# Altium PCB PCB.PcbDoc
Units mm, origin at the board's own origin, x right, y up, seen from the top; angles counter-clockwise.
Board outline 31.8 x 34 mm, 2 copper layers (Top Layer, Bottom Layer); 15 components, 13 nets, 61 pads, 7 vias.
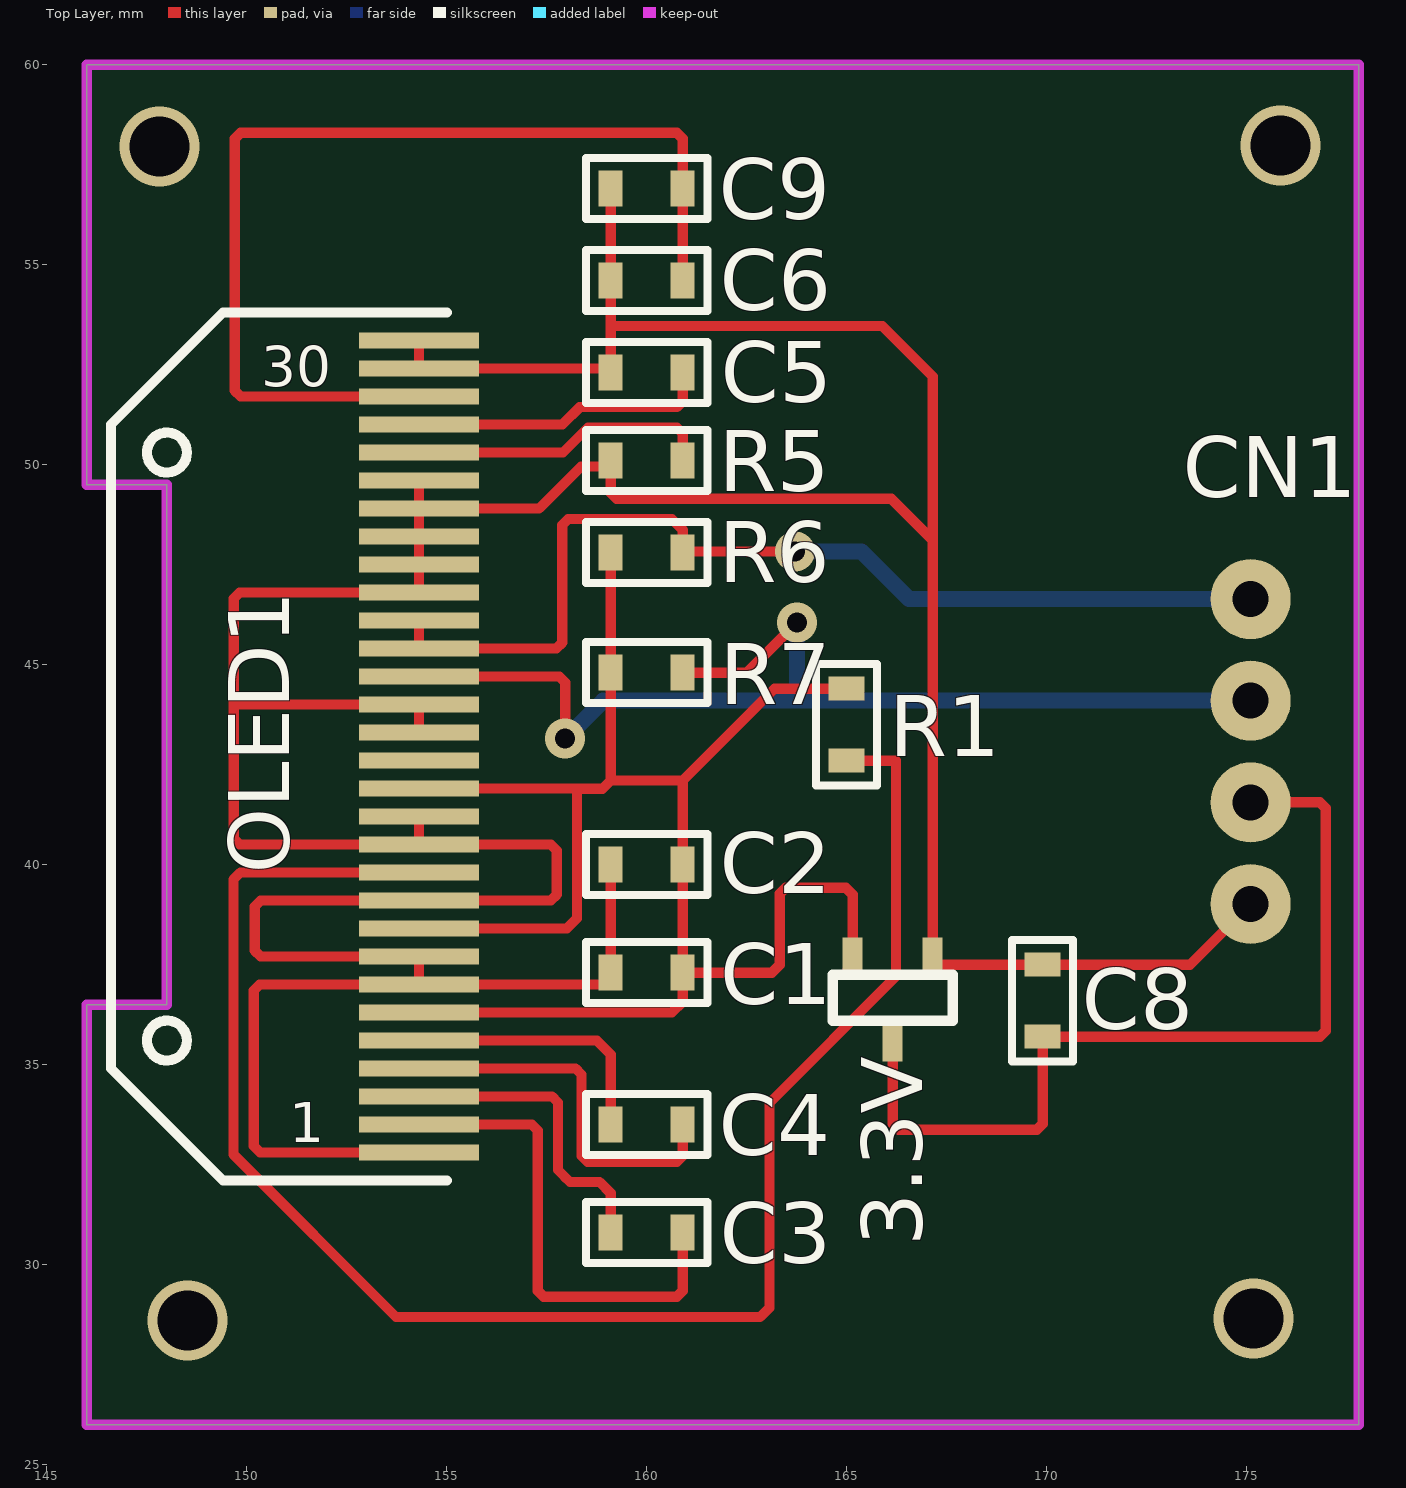
[diagram p0: Top Layer view]
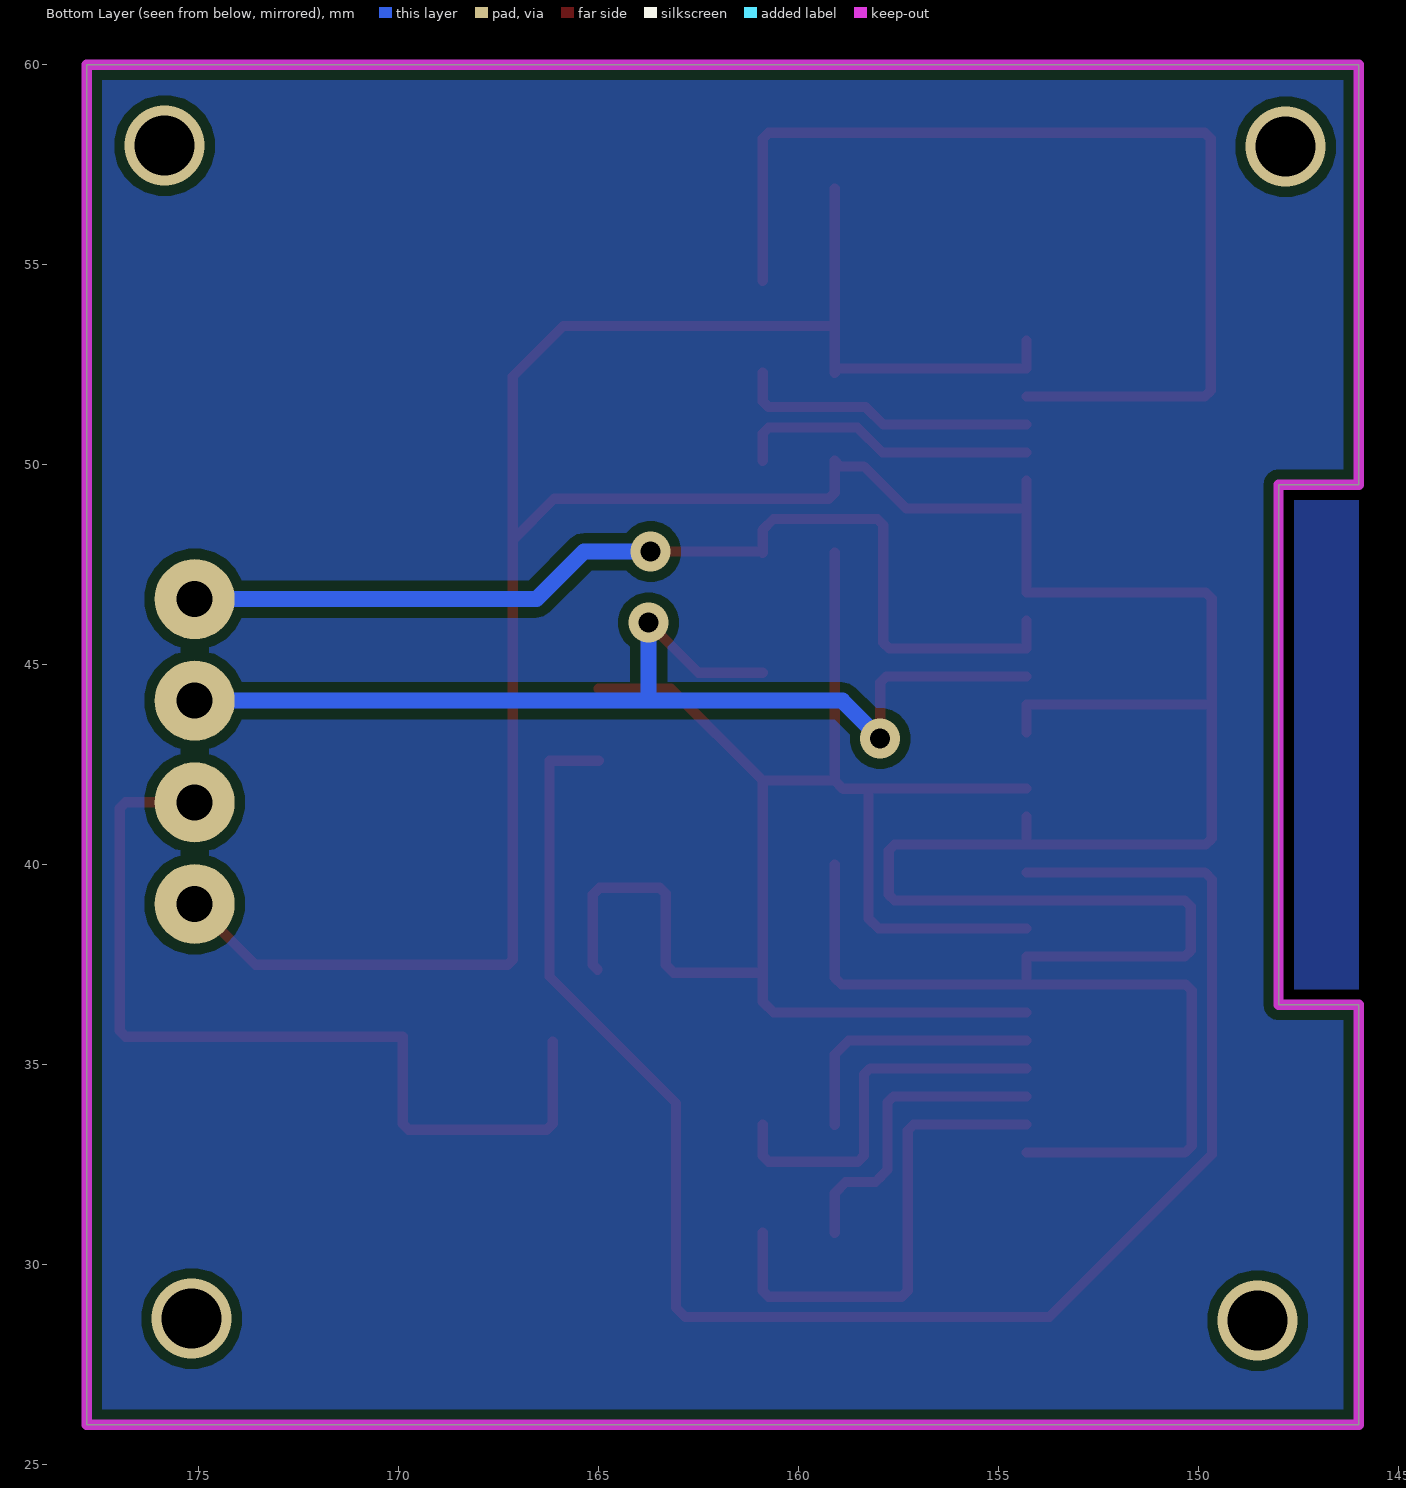
[diagram p1: Bottom Layer view, seen from below]
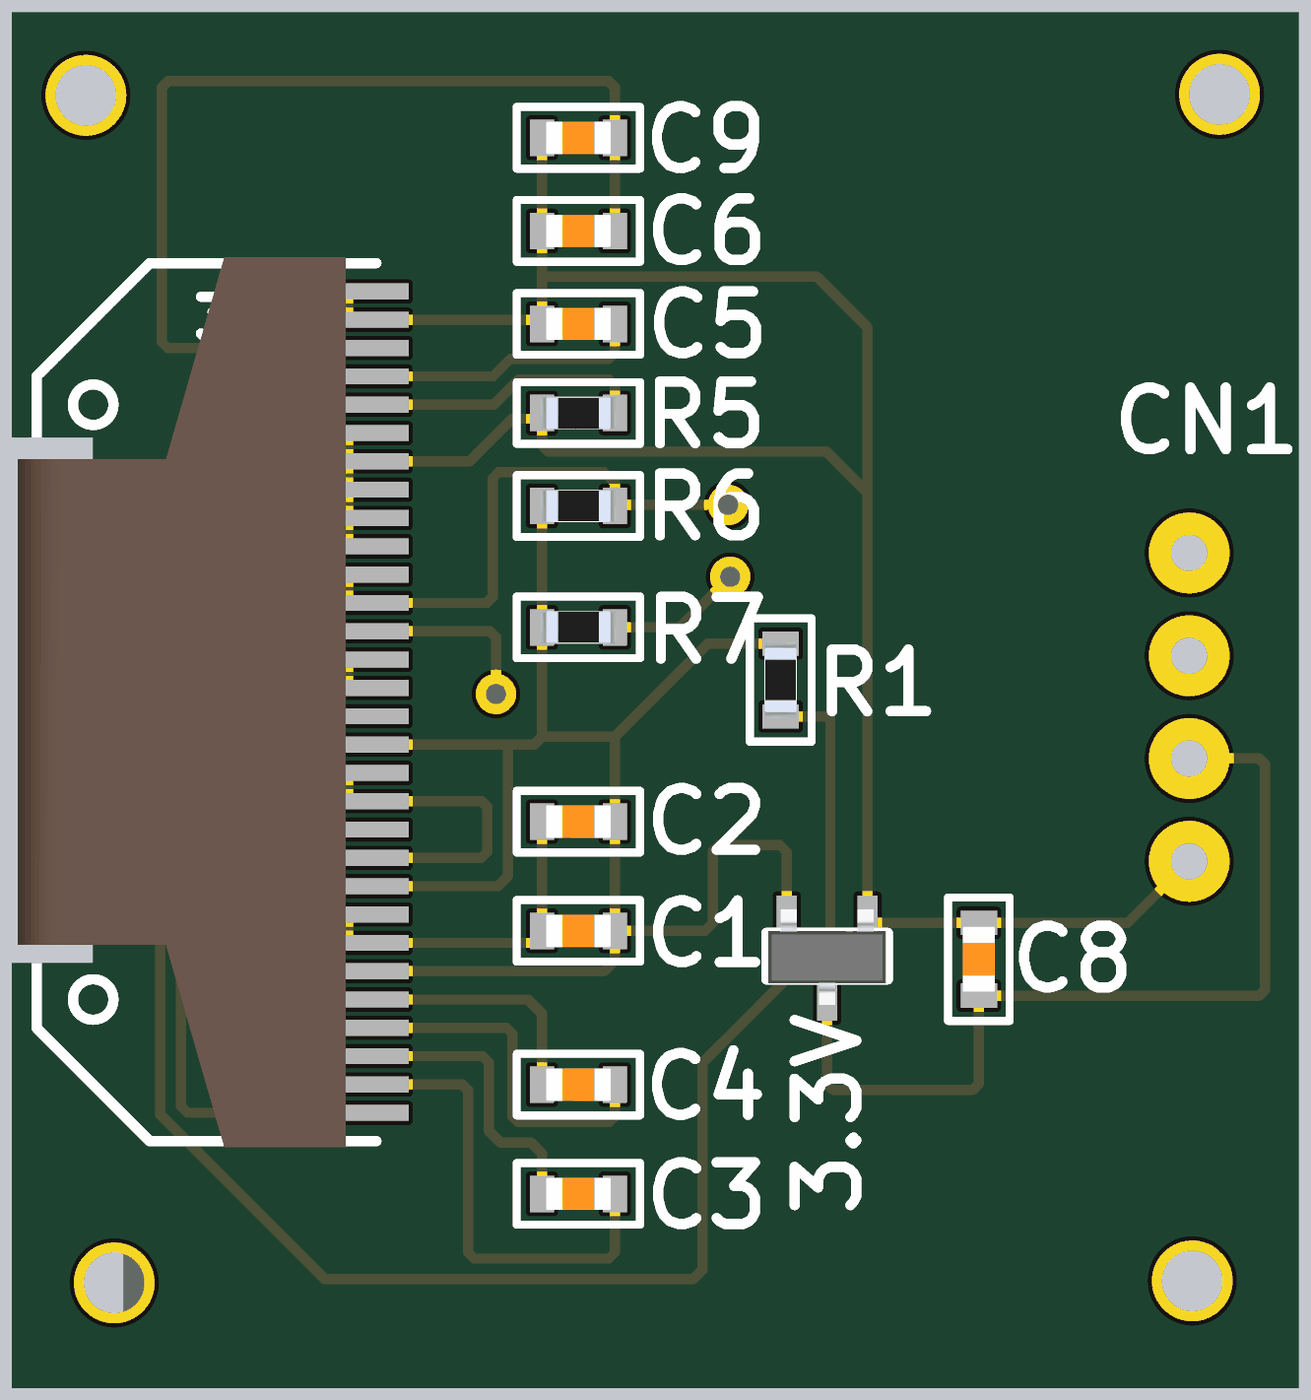
[diagram p2: 3D render of the assembled board from above, using the file's embedded part models]

## Layer stack, top to bottom
Top Solder: solder mask 0.0102, Solder Resist, Dk 3.5
Top Layer: signal copper 0.0356
Dielectric 1: dielectric 0.32, FR-4, Dk 4.8
Bottom Layer: signal copper 0.0356
Bottom Solder: solder mask 0.0102, Solder Resist, Dk 3.5

## Board outline
146,49.5 148,49.5 148,36.5 146,36.5 146,26 177.8,26 177.8,60 146,60

## Design rules (kind name [scope] priority, off if disabled: settings)
Clearance [All] p1: gap=0.254 ignorepadtopadclearanceinfootprint=TRUE
PolygonConnect [All] p1: connectstyle=Relief reliefconductorwidth=0.254 reliefentries=4 polygonreliefangle="90 Angle" airgapwidth=0.254
RoutingVias [All] p1: holewidth=0.5 width=1 viastyle="Through Hole" minholewidth=0.5 minwidth=1 maxholewidth=0.5 maxwidth=1
SolderMaskExpansion [All] p1: expansion=0.102 istentingtop=FALSE
Width [All] p1: maxlimit=0.26 minlimit=0.23 preferedwidth=0.254
30 further rules are at their usual default settings.

## Components (designator, comment, footprint, x,y, rotation, side; value= is the part's Value field where it differs from the comment)
3.3V "662K_3.3V" 662K_3.3V 166.2,36.7 r180 top
C1 "0603_1.55" C_0603 160,37.3 r0 top
C2 "0603_1.55" C_0603 160,40 r0 top
C3 "0603_1.55" C_0603 160,30.8 r0 top
C4 "0603_1.55" C_0603 160,33.5 r0 top
C5 "0603_1.55" C_0603 160,52.3 r0 top
C6 "0603_1.55" C_0603 160,54.6 r0 top
C8 "0603_1.55" C_0603 169.9,36.6 r270 top
C9 "0603_1.55" C_0603 160,56.9 r0 top
CN1 "0.9_REGULAR" CONNECTOR 175.1,39.02 r0 top
OLED1 "SSH1106" OLED_1.3 154.305,53.104 r0 top
R1 "0603_1.55" R_0603 165,43.5 r90 top
R5 "0603_1.55" R_0603 160,50.1 r0 top
R6 "0603_1.55" R_0603 160,47.8 r0 top
R7 "0603_1.55" R_0603 160,44.8 r0 top

## Footprints (in the part's own frame and the unit in brackets; to place one, negate y for a bottom-side part, rotate by r counter-clockwise, add the part's x,y. Pads: shape width x height; smd on the part's side, far side on the other; paste and mask are expansions set on the pad)
662K_3.3V [mm]
  rect 0.5x1 smd: 1(-0.95,-0.975) 2(1.05,-0.975) 3(0.05,1.125)
  silkscreen extent -1.45,-0.55 1.55,0.6, body extent -1.4,-1.13 1.5,1.24, height 1
C_0603 [mm]
  rect 0.6x0.9 smd: 1(-0.9,0) 2(0.9,0)
  silkscreen extent -1.52,-0.76 1.52,0.76, body extent -0.8,-0.4 0.8,0.4, height 0.31
CONNECTOR [mm]
  round 2 hole 0.9: 1(0,0) 2(0,2.54) 3(0,5.08) 4(0,7.62)
OLED_1.3 [mm]
  rect 3x0.4 smd: 1(0,-20.3) 2(0,-19.6) 3(0,-18.9) 4(0,-18.2) 5(0,-17.5) 6(0,-16.8) 7(0,-16.1) 8(0,-15.4) 9(0,-14.7) 10(0,-14) 11(0,-13.3) 12(0,-12.6) 13(0,-11.9) 14(0,-11.2) 15(0,-10.5) 16(0,-9.8) 17(0,-9.1) 18(0,-8.4) 19(0,-7.7) 20(0,-7) 21(0,-6.3) 22(0,-5.6) 23(0,-4.9) 24(0,-4.2) 25(0,-3.5) 26(0,-2.8) 27(0,-2.1) 28(0,-1.4) 29(0,-0.7) 30(0,0)
  silkscreen extent -7.7,-21 0.7,0.7, body extent -8.16,-26.97 17.55,6.67, height 0.11
R_0603 [mm]
  rect 0.6x0.9 smd: 1(-0.9,0) 2(0.9,0)
  silkscreen extent -1.52,-0.76 1.52,0.76, body extent -0.95,-0.4 0.95,0.4, height 0.43

## Part data
C1 C2 C3 C4 C5 C6 C8 C9: library part C_0603
CN1: library part CONNECTOR
OLED1: library part OLED_1.3
R1 R5 R6 R7: library part R_0603

## Via types
v1: diameter 2, hole 1.5, Top Layer to Bottom Layer, 4 vias
v2: diameter 1, hole 0.5, Top Layer to Bottom Layer, 3 vias

## Nets (pads, with @x,y where several pads share a name; then routed paths per layer and width w, separated by ;. In a path a pad name is that pad's centre, name@x,y a point inside that pad or via, vN(x,y) a via of type N, cw(c..) or ccw(c..) an arc to the next point about the centre after c; other vN are vias at no path point)
GND: 3.3V.1 C1.1 C2.1 C5.1 C6.1 C8.1 C9.1 CN1.1 OLED1.1 OLED1.7 OLED1.8 OLED1.10 OLED1.12 OLED1.13 OLED1.16 OLED1.17 OLED1.21 OLED1.22 OLED1.23 OLED1.24 OLED1.25 OLED1.29 OLED1.30 R5.1 | length 119
  Top Layer w0.254: OLED1.1 150.339,32.804 150.175,32.968 150.175,36.855 150.324,37.004 OLED1.7 ; OLED1.13 OLED1.12 ; OLED1.16 OLED1.17 149.675,44.004 ; OLED1.25 OLED1.24 ; OLED1.30 OLED1.29 158.996,52.404 C5.1 159.1,52.404 159.1,53.467 ; C2.1 159.1,37.177 158.927,37.004 OLED1.7 ; C9.1 C6.1 159.1,53.467 ; CN1.1 173.58,37.5 C8.1 167.273,37.5 167.15,37.623 167.15,48.115 ; 149.675,44.004 149.675,40.653 149.824,40.504 OLED1.12 ; 149.675,44.004 149.675,46.655 149.824,46.804 OLED1.21 OLED1.22 OLED1.23 OLED1.24 ; OLED1.7 OLED1.8 150.349,37.704 150.2,37.853 150.2,38.955 150.349,39.104 OLED1.10 157.601,39.104 157.75,39.253 157.75,40.355 157.601,40.504 OLED1.12 ; OLED1.24 157.311,48.904 158.365,49.957 158.957,49.957 R5.1 159.1,49.298 159.249,49.149 166.116,49.149 167.15,48.115 ; 159.1,53.467 165.887,53.467 167.15,52.204 167.15,48.115
NetC3_1: C3.1 OLED1.3 | length 7.8
  Top Layer w0.254: OLED1.3 157.634,34.204 157.783,34.055 157.783,32.367 157.933,32.217 157.933,32.216 158.082,32.067 158.823,32.067 159.1,31.79 C3.1
NetC3_2: C3.2 OLED1.2 | length 12.2
  Top Layer w0.254: OLED1.2 157.126,33.504 157.275,33.355 157.275,29.349 157.424,29.2 160.751,29.2 160.9,29.349 C3.2
NetC4_1: C4.1 OLED1.5 | length 6.7
  Top Layer w0.254: OLED1.5 158.753,35.604 159.1,35.257 C4.1
NetC4_2: C4.2 OLED1.4 | length 9.6
  Top Layer w0.254: OLED1.4 158.222,34.904 158.37,34.755 158.37,32.724 158.519,32.575 160.751,32.575 160.9,32.724 C4.2
NetC5_2: C5.2 OLED1.27 | length 7.5
  Top Layer w0.254: OLED1.27 157.887,51.004 158.322,51.439 160.751,51.439 160.9,51.588 C5.2
NetC6_2: C6.2 C9.2 OLED1.28 | length 25.8
  Top Layer w0.254: OLED1.28 149.849,51.704 149.7,51.853 149.7,58.151 149.849,58.3 160.751,58.3 160.9,58.151 C9.2 C6.2
NetOLED1_11: OLED1.11 R1.1 | length 43
  Top Layer w0.254: OLED1.11 149.841,39.804 149.667,39.63 149.667,32.758 153.733,28.692 162.836,28.692 163.068,28.924 163.068,34.043 166.229,37.204 166.229,42.6 R1.1
NetOLED1_26: OLED1.26 R5.2 | length 7.6
  Top Layer w0.254: OLED1.26 157.906,50.304 158.533,50.931 160.751,50.931 160.9,50.782 R5.2
SCL: CN1.3 OLED1.18 R7.2 | length 28
  Top Layer w0.254: OLED1.18 157.814,44.704 157.963,44.555 v2(157.963,43.155) ; R7.2 162.504,44.8 v2(163.754,46.05)
  Bottom Layer w0.4: v2(157.963,43.155) 158.908,44.1 163.754,44.1 ; v2(163.754,46.05) 163.754,44.1 ; CN1.3 163.754,44.1
SDA: CN1.4 OLED1.19 OLED1.20 R6.2 | length 25.7
  Top Layer w0.254: OLED1.20 OLED1.19 157.738,45.404 157.886,45.553 157.886,48.492 158.035,48.641 160.63,48.641 160.9,48.371 R6.2 160.928,47.828 v2(163.703,47.828)
  Bottom Layer w0.4: v2(163.703,47.828) 165.372,47.828 166.56,46.64 CN1.4
VCC: 3.3V.2 C1.2 C2.2 OLED1.6 OLED1.9 OLED1.14 R1.2 R6.1 R7.1 | length 45.1
  Top Layer w0.254: OLED1.6 160.628,36.304 160.9,36.576 C1.2 ; OLED1.9 158.001,38.404 158.258,38.661 158.258,41.904 OLED1.14 ; 158.258,41.9 158.896,41.9 159.1,42.104 ; R6.1 R7.1 159.1,42.104 ; R1.2 163.196,44.4 160.9,42.104 ; 3.3V.2@165.027,37.375 165.15,37.498 3.3V.2 165.15,39.251 164.976,39.425 163.474,39.425 163.325,39.276 163.325,37.5 163.125,37.3 C1.2 ; 159.1,42.104 160.9,42.104 ; C1.2 C2.2 160.9,42.104
VCC_IN: 3.3V.3 C8.2 CN1.2 | length 22.7
  Top Layer w0.254: 3.3V.3 166.15,33.524 166.299,33.375 169.751,33.375 169.9,33.524 C8.2 176.826,35.7 176.975,35.849 176.975,41.411 176.826,41.56 CN1.2
pads on no net: OLED1.15
copper on no net:
  other v1: 148.525,28.6 175.175,28.65 147.825,57.95 175.85,57.975

## Polygon pours and split planes (outlines as drawn)
no net on Bottom Layer "NONET_L02_P000" (solid, pour order 0): 146,60 177.8,60 177.8,26 146,26

## Keep-outs
Top Layer:
  lines w0.254: 148,36.5 148.002,36.502 ; 148.001,49.499 148.002,49.498
Keep-Out Layer:
  the board outline again, w0.254

## Text inside footprints (layer, text, board x,y; h text height)
OLED1: Top Overlay "1" at 151.059,33.058 h1; Top Overlay "30" at 150.359,51.958 h1